# Altium PCB PCB2.PcbDoc (part 1 of 2)
Units mm, origin at the board's own origin, x right, y up, seen from the top; angles counter-clockwise.
Board outline 99.9 x 100 mm, 2 copper layers (Top Layer, Bottom Layer); 96 components, 76 nets, 354 pads, 43 vias.
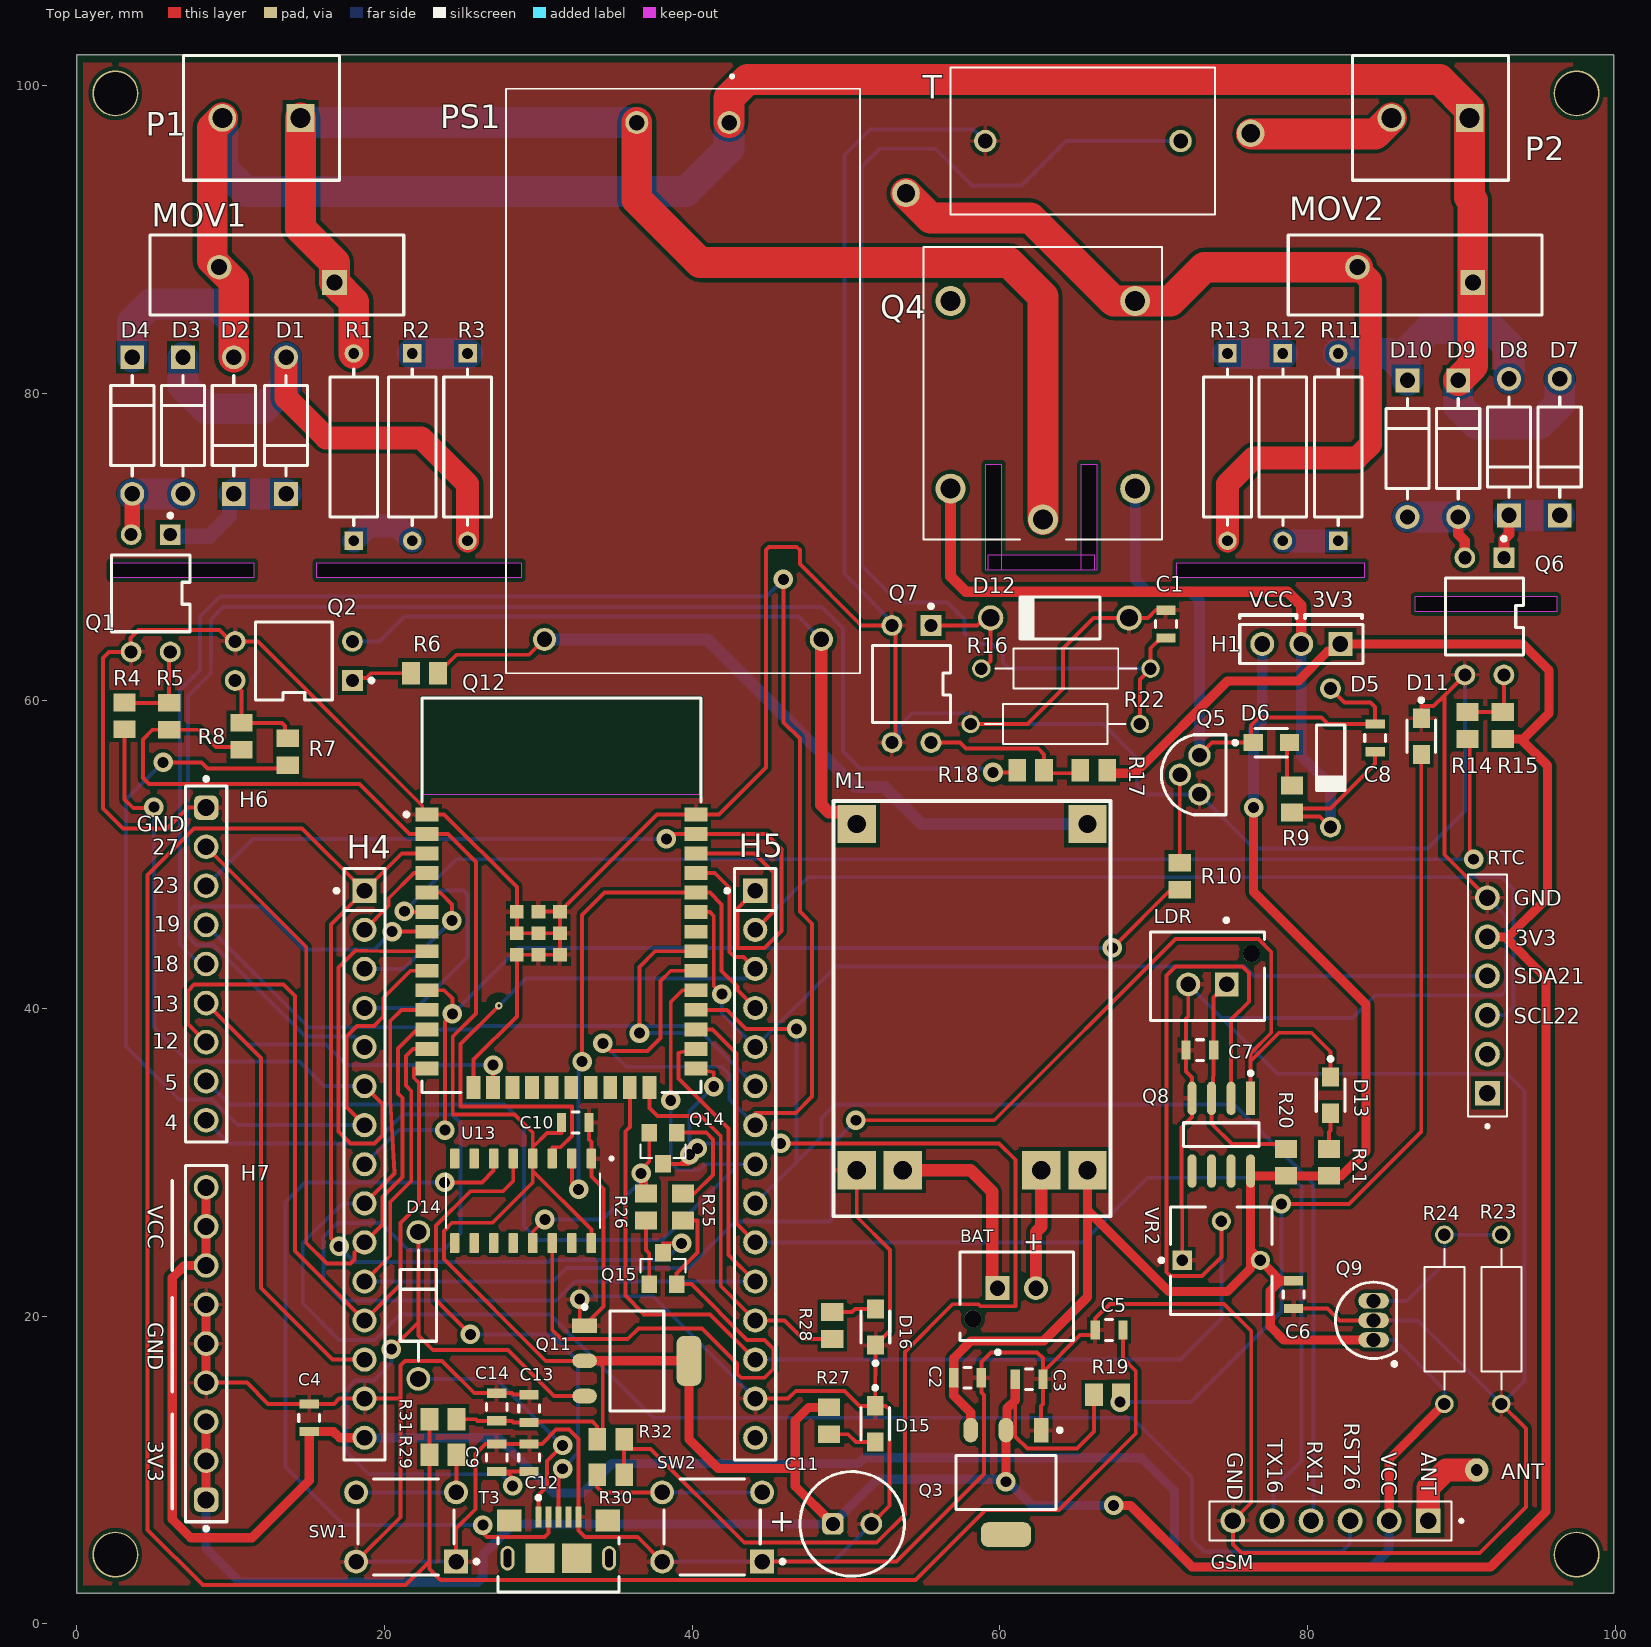
[diagram p0: Top Layer view]
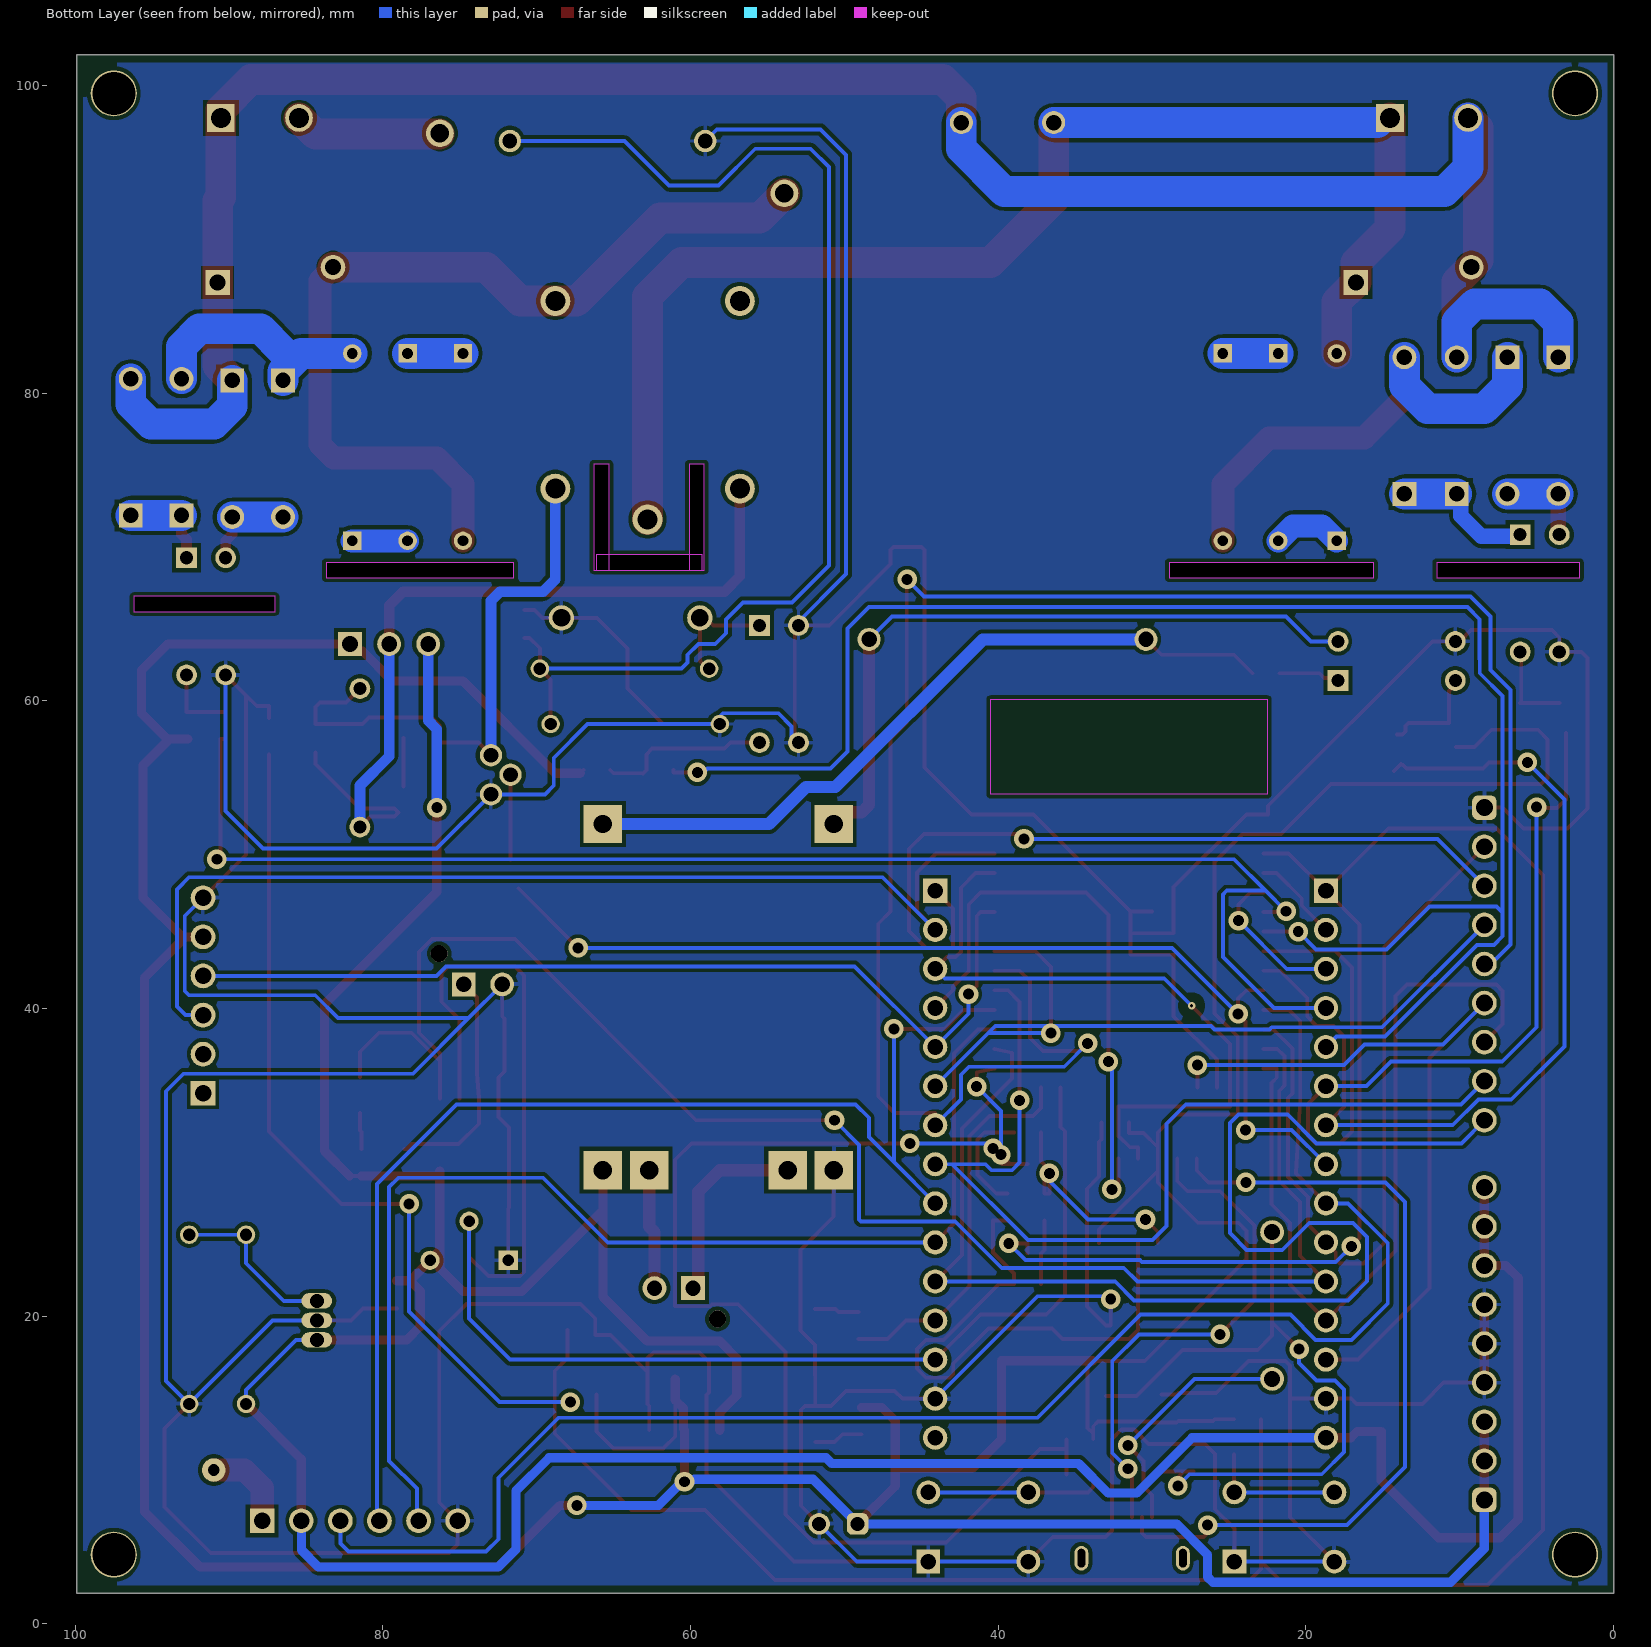
[diagram p1: Bottom Layer view, seen from below]
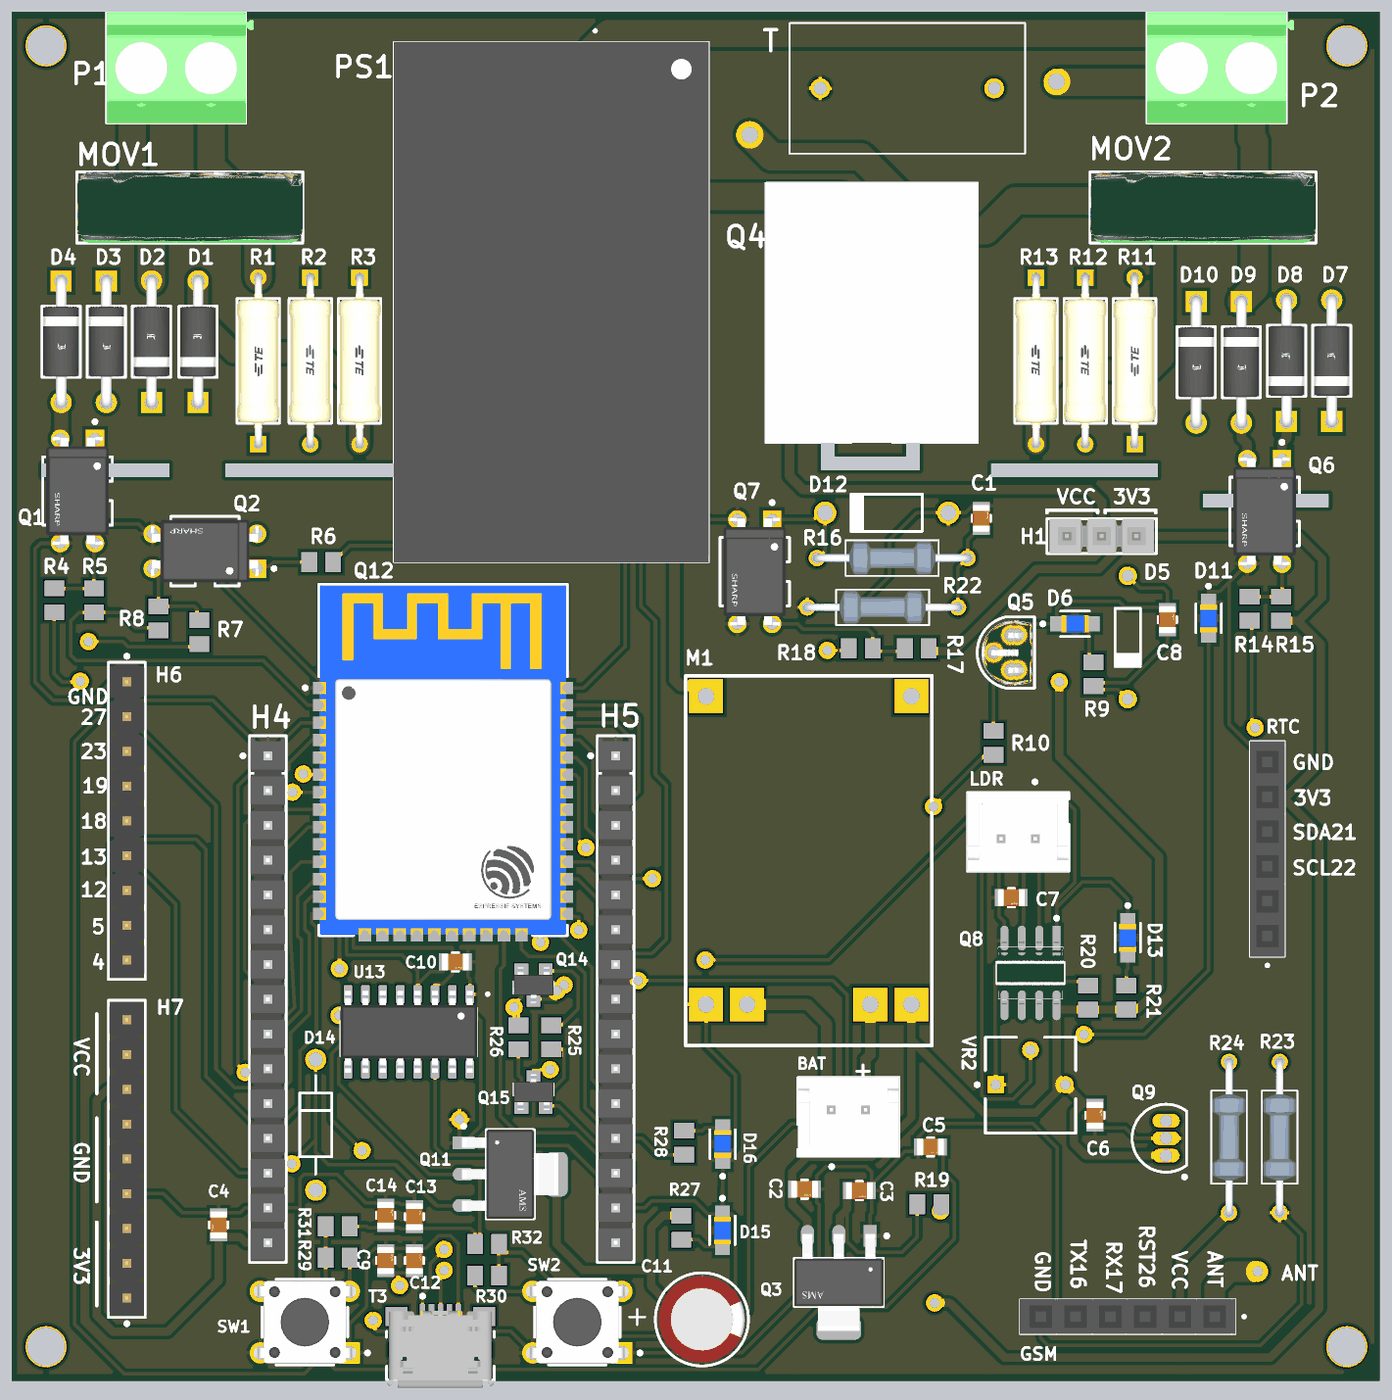
[diagram p2: 3D render of the assembled board from above, using the file's embedded part models]

## Layer stack, top to bottom
Top Solder: solder mask 0.0102, Solder Resist, Dk 3.5
Top Layer: signal copper 0.0356
Dielectric 1: dielectric 0.32, FR-4, Dk 4.8
Bottom Layer: signal copper 0.0356
Bottom Solder: solder mask 0.0102, Solder Resist, Dk 3.5

## Board outline
0,2 99.9,2 99.9,102 0,102
cut-out: 66.3,68.5 65.3,68.5 65.3,75.4 66.3,75.4
cut-out: 60.1,68.5 59.1,68.5 59.1,75.4 60.1,75.4
cut-out: 59.25,68.5 59.25,69.5 66.15,69.5 66.15,68.5
cut-out: 71.5,68 71.5,69 83.7,69 83.7,68
cut-out: 87,65.8 87,66.8 96.2,66.8 96.2,65.8
cut-out: 15.6,68 15.6,69 28.9,69 28.9,68
cut-out: 2.2,68 2.2,69 11.5,69 11.5,68

## Design rules (kind name [scope] priority, off if disabled: settings)
Clearance [All] p1: gap=0.254 ignorepadtopadclearanceinfootprint=FALSE
PolygonConnect [All] p1: connectstyle=Relief reliefconductorwidth=0.254 reliefentries=4 polygonreliefangle="90 Angle" airgapwidth=0.254
RoutingVias [All] p1: holewidth=0.711 width=1.27 viastyle="Through Hole" minholewidth=0.711 minwidth=1.27 maxholewidth=0.711 maxwidth=1.27
SolderMaskExpansion [All] p1: expansion=0.102 istentingtop=FALSE
SupplyNets "Schematic Supply Nets_3" [InNet('VCC')] p1: voltage=0.000
SupplyNets "Schematic Supply Nets_2" [InNet('+3.3')] p2: voltage=0.000
SupplyNets "Schematic Supply Nets" [InNet('GND')] p3: voltage=0.000
Width [All] p1: maxlimit=2 minlimit=0.254 preferedwidth=0.254 minimp=50.000000 maximp=50.000000 favimp=50.000000
30 further rules are at their usual default settings.

## Classes and differential pairs
component class Sheet2: C9 C10 C11 C12 C13 C14 D14 D15 D16 H4 H6 H7 Q11 Q12 Q14 Q15 R25 R26 R27 R28 R29 R30 R31 R32 SW1 SW2 T3 U13
component class Sheet1: BAT C1 C2 C3 C4 C5 C6 C7 C8 D1 D2 D3 D4 D5 D6 D7 D8 D9 D10 D11 D12 D13 GSM H1 H5 LDR M1 MOV1 MOV2 P1 P2 PS1 Q1 Q2 Q3 Q4 Q5 Q6 Q7 Q8 Q9 R1 R2 R3 R4 R5 R6 R7 R8 R9 R10 R11 R12 R13 R14 R15 R16 R17 R18 R19 R20 R21 R22 R23 R24 RTC T VR2

## Components (designator, comment, footprint, x,y, rotation, side; value= is the part's Value field where it differs from the comment)
BAT "Battary" FP-B2B-XH-AM_LF_SN-MFG 61.1,21.3 r180 top
C1 "104" FP-GRM21B-0_1-MFG 70.8,65 r90 top
C2 "10uf" FP-GRM21B-0_1-MFG 57.9,16 r0 top
C3 "10uf" FP-GRM21B-0_1-MFG 61.9,15.9 r0 top
C4 "10uf" FP-GRM21B-0_1-MFG 15.1,13.4 r270 top
C5 "10uf" FP-GRM21B-0_1-MFG 67.1,19.1 r0 top
C6 "104" FP-GRM21B-0_1-MFG 79.1,21.4 r90 top
C7 "104" FP-GRM21B-0_1-MFG 73,37.3 r0 top
C8 "10uf" FP-GRM21B-0_1-MFG 84.4,57.6 r90 top
C9 "10uf" FP-GRM21B-0_1-MFG 27.3,10.8 r90 top
C10 "10uf" FP-GRM21B-0_1-MFG 32.4,32.6 r0 top
C11 "100uf" WCAP-PT5H_D6.3H11 50.4,6.5 r180 top
C12 "104" FP-GRM21B-0_1-MFG 29.4,10.8 r90 top
C13 "104" FP-GRM21B-0_1-MFG 29.4,14 r90 top
C14 "10uf" FP-GRM21B-0_1-MFG 27.3,14.1 r90 top
D1 "1N4007" FP-1N4007-MFG 13.6,77.9 r90 top value=15pF
D2 "1N4007" FP-1N4007-MFG 10.2,77.9 r90 top value=15pF
D3 "1N4007" FP-1N4007-MFG 6.9,77.9 r270 top value=15pF
D4 "1N4007" FP-1N4007-MFG 3.6,77.9 r270 top value=15pF
D5 "1N4148" NXP-SOD27-2_V 81.5,56.3 r270 top
D6 "RLY" FP-KP-2012QBC-D-MFG 77.649,57.291 r0 top
D7 "1N4007" FP-1N4007-MFG 96.4,76.5 r90 top value=15pF
D8 "1N4007" FP-1N4007-MFG 93.1,76.5 r90 top value=15pF
D9 "1N4007" FP-1N4007-MFG 89.8,76.4 r270 top value=15pF
D10 "1N4007" FP-1N4007-MFG 86.5,76.4 r270 top value=15pF
D11 "PWR" FP-KP-2012QBC-D-MFG 87.4,57.7 r270 top
D12 "1N4728A" FAIR-DO-41-2_V 63.9,65.4 r180 top
D13 "LED" FP-KP-2012QBC-D-MFG 81.5,34.375 r270 top
D14 "1N5817G" ONSC-AXIAL_LEAD-2-59-10_P 22.196,20.7 r270 top
D15 "PWR" FP-KP-2012QBC-D-MFG 51.9,13 r270 top
D16 "PWR" FP-KP-2012QBC-D-MFG 51.916,19.3 r90 top
GSM "PPTC061LFBN-RC" SULLINS_PPTC061LFBN-RC 81.5,6.7 r180 top
H1 "TSW-103-07-F-S" SMTC-TSW-103-07-X-S 82.14,63.7 r180 top
H4 "TSW-115-23-T-S" FP-TSW-115-23-T-S-MFG 18.7,29.88 r270 top
H5 "TSW-115-23-T-S" FP-TSW-115-23-T-S-MFG 44.1,29.88 r270 top
H6 "PWR" 61300911121 8.4,42.9 r270 top
H7 "PWR" 61300911121 8.4,18.22 r90 top
LDR "LDR" FP-B2B-XH-AM_LF_SN-MFG 73.5,42.1 r0 top
M1 "TP4057" TP4056 67.2,26.5 r90 top
MOV1 "MOV275VAC" FP-MOV-14D431K-MFG 13,87.7 r180 top value=552pF
MOV2 "MOV275VAC" FP-MOV-14D431K-MFG 87,87.7 r180 top value=552pF
P1 "AC230V IN" PHOE-1729128-2_V 12,97.9 r180 top
P2 "1729128" PHOE-1729128-2_V 88,97.9 r180 top
PS1 "HLK-5M05" CONV_HLK-5M05 39.4,80.8 r270 top
Q1 "PC817" FP-PC817X1J000F-MFG 4.8,67 r270 top
Q2 "PC817" FP-PC817X1J000F-MFG 14.1,62.6 r180 top
Q3 "AMS1117 3.3" FP-AMS1117-IPC_A 60.4,9.2 r270 top
Q4 "3VDC Relay" RELAY_PR13-5V-450-1C 62.8,80 r90 top
Q5 "S8050" FP-135AN-MFG 72.6,55.2 r0 top
Q6 "PC817" FP-PC817X1J000F-MFG 91.5,65.5 r270 top
Q7 "PC817" FP-PC817X1J000F-MFG 54.256,61.1 r270 top
Q8 "LM358" FP-D0008A-IPC_B 74.4,31.8 r270 top
Q9 "TL431CZ" TO-92 84.3,19.73 r0 top
Q11 "AMS1117 3.3" FP-AMS1117-IPC_A 36.4,17.1 r0 top
Q12 "ESP32-WROOM-32E (16MB)" FP-ESP32-WROOM-32E_16MB-MFG 31.5,47.36 r0 top
Q14 "S8050" SOT-23 38.1,30.916 r180 top
Q15 "S8050" SOT-23 38.1,23.1 r0 top
R1 "75K" FP-CFR50J2K2-MFG 18,76.5 r90 top
R2 "75K" FP-CFR50J2K2-MFG 21.8,76.5 r270 top
R3 "75K" FP-CFR50J2K2-MFG 25.4,76.5 r270 top
R4 "1K" RESC2013X70X40NL20T20 3.1,59.025 r90 top
R5 "10K" RESC2013X70X40NL20T20 6,59 r90 top
R6 "330R" RESC2013X70X40NL20T20 22.6,61.8 r0 top
R7 "1K" RESC2013X70X40NL20T20 13.7,56.7 r90 top
R8 "10K" RESC2013X70X40NL20T20 10.7,57.7 r90 top
R9 "1K" RESC2013X70X40NL20T20 79,53.625 r270 top
R10 "1K" RESC2013X70X40NL20T20 71.7,48.6 r270 top
R11 "75K" FP-CFR50J2K2-MFG 82,76.5 r90 top
R12 "75K" FP-CFR50J2K2-MFG 78.4,76.5 r270 top
R13 "75K" FP-CFR50J2K2-MFG 74.8,76.5 r270 top
R14 "1K" RESC2013X70X40NL20T20 90.4,58.4 r270 top
R15 "10K" RESC2013X70X40NL20T20 92.7,58.4 r90 top
R16 "330R" RESAD1100W55L680D260 64.3,62.1 r0 top
R17 "10K" RESC2013X70X40NL20T20 66.1,55.5 r180 top
R18 "1K" RESC2013X70X40NL20T20 62,55.5 r0 top
R19 "1K" RESC2013X70X40NL20T20 67,14.9 r180 top
R20 "10K" RESC2013X70X40NL20T20 78.6,30 r90 top
R21 "1K" RESC2013X70X40NL20T20 81.4,30 r90 top
R22 "10K" RESAD1100W55L680D260 63.601,58.5 r180 top
R23 "4K7" RESAD1100W55L680D260 92.6,19.8 r270 top
R24 "2K8" RESAD1100W55L680D260 88.9,19.8 r90 top
R25 "10K" RESC2013X70X40NL20T20 39.4,27.1 r270 top
R26 "10K" RESC2013X70X40NL20T20 37,27.1 r270 top
R27 "1K" RESC2013X70X40NL20T20 48.9,13.2 r90 top
R28 "1K" RESC2013X70X40NL20T20 49.1,19.4 r270 top
R29 "470R" RESC2013X70X40NL20T20 23.8,11 r0 top
R30 "470R" RESC2013X70X40NL20T20 34.7,9.7 r180 top
R31 "10K" RESC2013X70X40NL20T20 23.8,13.3 r180 top
R32 "10K" RESC2013X70X40NL20T20 34.7,12 r0 top
RTC "PPTC061LFBN-RC" SULLINS_PPTC061LFBN-RC 91.7,40.85 r90 top
SW1 "RST" FP-TL1105AF160Q-MFG 21.4,6.3 r180 top
SW2 "BOOT" FP-TL1105AF160Q-MFG 41.3,6.3 r180 top
T "AX-0500" INDRR1270W55L1720T953H2040_AX-0500 65.4,96.4 r180 top
T3 "Micro USB" FCI-10118193-0001LF-5_V 31.3,5.621 r0 top
U13 "CH340G" SOIC127P600X180-16N 29,27.5 r270 top
VR2 "10K" BOUR-3362P 74.4,23.6 r0 top

## Footprints (in the part's own frame and the unit in brackets; to place one, negate y for a bottom-side part, rotate by r counter-clockwise, add the part's x,y. Pads: shape width x height; smd on the part's side, far side on the other; paste and mask are expansions set on the pad)
61300911121 [mm] "Pin Header, pitch 2.54 mm, THT, Vertical, single row, 9p"
  rrect50% 1.6x1.6 hole 1.1: 1(-10.16,0)
  round 1.6 hole 1.1: 2(-7.62,0) 3(-5.08,0) 4(-2.54,0) 5(0,0) 6(2.54,0) 7(5.08,0) 8(7.62,0) 9(10.16,0)
  silkscreen extent -12.15,-1.34 11.58,1.35, body extent -11.43,-1.27 11.43,1.27, height 8.57
BOUR-3362P [mm] "THD, 3-Leads, Body 6.6x6.99mm, Pitch 2.54mm"
  rect 1.25x1.25 hole 0.75: 1(-2.54,0.035)
  round 1.25 hole 0.75: 2(0,2.575) 3(2.54,0.035)
  silkscreen extent -4.02,-3.49 3.3,3.49, body extent -3.3,-3.49 3.3,3.49, height 4.95
CONV_HLK-5M05 [mm]
  round 1.5 hole 1: 1(-16.8,3) 2(-16.8,-3) 3(16.8,9) 4(16.8,-9)
  silkscreen extent -19.9,-11.5 19,11.5, body extent -19,-11.5 19,11.5, height 23
FAIR-DO-41-2_V [mm] "2-Leads, Axial leaded, Body 2.72x5.2mm, Pin Spacing 9mm"
  round 1.65 hole 1.15: 1(-4.5,0) 2(4.5,0)
  silkscreen extent -2.6,-1.36 2.6,1.36, body extent -4.93,-1.36 4.93,1.36, height 2.71
FCI-10118193-0001LF-5_V [mm] "Micro, USB-B, 5-Leads, Body 7.86x5.05mm, Pitch 0.65 mm"
  rect 0.4x1.35 smd: 1(-1.3,1.325) 2(-0.65,1.325) 3(0,1.325) 4(0.65,1.325) 5(1.3,1.325)
  rect 1.6x1.4 smd: 6(-3.2,1.1) 7(3.2,1.1)
  rect 1.9x1.9 smd: 8(-1.2,-1.35) 9(1.2,-1.35)
  oval 0.9x1.6 hole 0.5 slot 1.2 at 90 deg: 10(-3.3,-1.35) 11(3.3,-1.35)
  silkscreen extent -3.93,-3.55 3.93,2.7, body extent -3.93,-4.16 3.93,1.5, height 2.83
FP-1N4007-MFG [mm]
  rect 1.55x1.55 hole 1 paste-2539.97 mask+0: 1(-4.44,0)
  round 1.55 hole 1 paste-2539.97 mask+0: 2(4.44,0)
  silkscreen extent -3.26,-1.4 3.26,1.4, body extent -5.32,-1.5 5.32,1.5, height 0.25
FP-135AN-MFG [mm]
  round 1.45 hole 0.95 paste-2539.97 mask+0: 1(0.38,-1.27) 2(-0.89,0) 3(0.38,1.27)
  silkscreen extent -2.1,-2.6 2.1,2.6, body extent -2.19,-2.7 2.19,2.7, height 0.25
FP-AMS1117-IPC_A [mm]
  rect 1.604x0.952 smd paste+0 mask+0: 1(-3.395,2.29)
  rrect100% 1.604x0.952 smd paste+0 mask+0: 2(-3.395,0) 3(-3.395,-2.29)
  rrect59% 1.604x3.262 smd paste+0 mask+0: 4(3.395,0)
  silkscreen extent -3.52,-3.25 1.75,3.63, body extent -4.7,-3.75 4.7,3.75, height 0.25
FP-B2B-XH-AM_LF_SN-MFG [mm]
  rect 1.55x1.55 hole 1 paste-2539.97 mask+0: 1(1.25,-0.525)
  round 1.55 hole 1 paste-2539.97 mask+0: 2(-1.25,-0.525)
  round 1.1 hole 1.1 unplated paste-2539.97 mask+0: ""(2.85,1.475)
  silkscreen extent -3.7,-2.88 3.7,3.77, body extent -3.8,-2.98 3.8,2.98, height 0.25
FP-CFR50J2K2-MFG [mm]
  rect 1.2x1.2 hole 0.7 paste-2539.97 mask+0: 1(-6.09,0)
  round 1.2 hole 0.7 paste-2539.97 mask+0: 2(6.09,0)
  silkscreen extent -5.09,-1.55 5.09,1.55, body extent -6.79,-1.65 6.79,1.65, height 0.25
FP-D0008A-IPC_B [mm]
  rect 2.169x0.582 smd paste+0 mask+0: 1(-2.364,1.905)
  rrect100% 2.169x0.582 smd paste+0 mask+0: 2(-2.364,0.635) 3(-2.364,-0.635) 4(-2.364,-1.905) 5(2.364,-1.905) 6(2.364,-0.635) 7(2.364,0.635) 8(2.364,1.905)
  silkscreen extent -4.12,-2.45 0.78,2.45, body extent -3.7,-2.7 3.7,2.7, height 0.25
FP-ESP32-WROOM-32E_16MB-MFG [mm]
  rect 1.5x0.9 smd paste+0 mask+0: 1(-8.75,5.26) 2(-8.75,3.99) 3(-8.75,2.72) 4(-8.75,1.45) 5(-8.75,0.18) 6(-8.75,-1.09) 7(-8.75,-2.36) 8(-8.75,-3.63) 9(-8.75,-4.9) 10(-8.75,-6.17) 11(-8.75,-7.44) 12(-8.75,-8.71) 13(-8.75,-9.98) 14(-8.75,-11.25) 25(8.75,-11.25) 26(8.75,-9.98) 27(8.75,-8.71) 28(8.75,-7.44) 29(8.75,-6.17) 30(8.75,-4.9) 31(8.75,-3.63) 32(8.75,-2.36) 33(8.75,-1.09) 34(8.75,0.18) 35(8.75,1.45) 36(8.75,2.72) 37(8.75,3.99) 38(8.75,5.26)
  rect 0.9x1.5 smd paste+0 mask+0: 15(-5.715,-12.5) 16(-4.445,-12.5) 17(-3.175,-12.5) 18(-1.905,-12.5) 19(-0.635,-12.5) 20(0.635,-12.5) 21(1.905,-12.5) 22(3.175,-12.5) 23(4.445,-12.5) 24(5.715,-12.5)
  rect 0.9x0.9 smd paste+0 mask+0: 39(-2.9,-3.86) 39(-2.9,-2.46) 39(-2.9,-1.06) 39(-1.5,-3.86) 39(-1.5,-2.46) 39(-1.5,-1.06) 39(-0.1,-3.86) 39(-0.1,-2.46) 39(-0.1,-1.06)
  Keep-Out Layer region: -9,6.56 9,6.56 9,12.75 -9,12.75
  silkscreen extent -10.2,-12.82 9.08,12.82, body extent -9.6,-13.35 9.6,12.93, height 0.25
FP-GRM21B-0_1-MFG [mm]
  rect 0.6x1.25 smd paste+0 mask+0: 1(-0.9,0) 2(0.9,0)
  silkscreen extent -0.23,-0.68 0.23,0.67, body extent -1.3,-0.77 1.3,0.77, height 0.25
FP-KP-2012QBC-D-MFG [mm]
  rect 1.25x1.1 smd paste+0 mask+0: 1(-1.175,0) 2(1.175,0)
  silkscreen extent -2.47,-0.93 1.05,0.93, body extent -1.9,-0.77 1.9,0.77, height 0.25
FP-MOV-14D431K-MFG [mm]
  rect 1.6x1.6 hole 1.05 paste-2539.97 mask+0: 1(-3.75,0.5)
  round 1.6 hole 1.05 paste-2539.97 mask+0: 2(3.75,-0.5)
  silkscreen extent -8.25,-2.6 8.25,2.6, body extent -8.35,-2.7 8.35,2.7, height 0.25
FP-PC817X1J000F-MFG [mm]
  rect 1.35x1.35 hole 0.85 paste-2539.97 mask+0: 1(-3.81,1.27)
  round 1.35 hole 0.85 paste-2539.97 mask+0: 2(-3.81,-1.27) 3(3.81,-1.27) 4(3.81,1.27)
  silkscreen extent -5.17,-2.54 2.5,2.54, body extent -4.58,-2.64 4.58,2.64, height 0.25
FP-TL1105AF160Q-MFG [mm]
  rect 1.55x1.55 hole 1 paste-2539.97 mask+0: 1(-3.25,2.25)
  round 1.55 hole 1 paste-2539.97 mask+0: 2(3.25,2.25) 3(-3.25,-2.25) 4(3.25,-2.25)
  silkscreen extent -4.7,-3.13 3.13,3.13, body extent -4.13,-3.22 4.13,3.22, height 0.25
FP-TSW-115-23-T-S-MFG [mm]
  rect 1.57x1.57 hole 1.02 paste-2539.97 mask+0: 1(-17.78,0)
  round 1.57 hole 1.02 paste-2539.97 mask+0: 2(-15.24,0) 3(-12.7,0) 4(-10.16,0) 5(-7.62,0) 6(-5.08,0) 7(-2.54,0) 8(0,0) 9(2.54,0) 10(5.08,0) 11(7.62,0) 12(10.16,0) 13(12.7,0) 14(15.24,0) 15(17.78,0)
  silkscreen extent -19.24,-1.95 19.24,1.34, body extent -19.34,-1.44 19.34,1.44, height 0.25
INDRR1270W55L1720T953H2040_AX-0500 [mm]
  round 1.458 hole 0.95: 1(-6.35,0) 3(6.35,0)
  silkscreen extent -8.6,-4.77 8.6,4.77
NXP-SOD27-2_V [mm] "SOD27, 2-Leads, Dia 1.85mm, Body Length 4.25mm, Pin Spacing 9mm"
  round 1.35 hole 0.85: 1(-4.5,0) 2(4.5,0)
  silkscreen extent -2.12,-0.93 2.13,0.92, body extent -4.78,-0.92 4.78,0.92, height 1.84
ONSC-AXIAL_LEAD-2-59-10_P [mm] "AXIAL, 2-Leads, Diameter 2.35mm"
  round 1.55 hole 1.05: 1(-4.77,0) 2(4.77,0)
  silkscreen extent -3.59,-1.18 3.59,1.17
PHOE-1729128-2_V [mm] "Receptacle, 2-Leads, Body 8.1x10.16mm, Pitch 5.08mm"
  rect 1.8x1.8 hole 1.3: 1(-2.54,0)
  round 1.8 hole 1.3: 2(2.54,0)
  silkscreen extent -5.08,-4.05 5.08,4.05, body extent -5.65,-4.05 5.08,4.05, height 10.01
RELAY_PR13-5V-450-1C [mm]
  round 1.95 hole 1.3: A1(-6.2,6) A2(-6.2,-6) COM(-8.2,0) NC(6,6) NO(6,-6)
  silkscreen extent -9.5,-7.75 9.5,7.75, body extent -9.5,-7.75 9.5,7.75, height 15.5
RESAD1100W55L680D260 [mm]
  round 1.2 hole 0.8: 1(-5.5,0) 2(5.5,0)
  silkscreen extent -4.58,-1.3 4.58,1.3, body extent -5.77,-1.2 5.77,1.2, height 2.4
RESC2013X70X40NL20T20 [mm] "Chip Resistor, 2-Leads, Body 2.00x1.25mm, IPC Medium Density"
  rect 1.15x1.45 smd: 1(-0.875,0) 2(0.875,0)
  body extent -1.1,-0.72 1.1,0.72, height 0.7
SMTC-TSW-103-07-X-S [mm] ".025 SQ Post Terminal Strip Assembly, 1x3 Pins, Vertical, 2.54mm Pitch, Male"
  rect 1.55x1.55 hole 1.02: 1(0,0)
  round 1.55 hole 1.02: 2(2.54,0) 3(5.08,0)
  silkscreen extent -1.46,-1.27 6.54,1.27, body extent -1.27,-1.27 6.35,1.27, height 8.38
SOIC127P600X180-16N [mm]
  rrect25% 1.31x0.62 smd: 1(-2.75,4.445) 2(-2.75,3.175) 3(-2.75,1.905) 4(-2.75,0.635) 5(-2.75,-0.635) 6(-2.75,-1.905) 7(-2.75,-3.175) 8(-2.75,-4.445) 9(2.75,-4.445) 10(2.75,-3.175) 11(2.75,-1.905) 12(2.75,-0.635) 13(2.75,0.635) 14(2.75,1.905) 15(2.75,3.175) 16(2.75,4.445)
  silkscreen extent -2.85,-5 1.77,5.85, body extent -3,-5 3,5, height 1.8
SOT-23 [mil]
  rect 40x45 smd: 1(-35,-40) 2(35,-40) 3(0,40)
  silkscreen extent -57,-10 58,25, body extent -57,-51 57,51, height 55
SULLINS_PPTC061LFBN-RC [mm]
  rect 1.605x1.605 / inner round 1.605 / far side rect 1.605x1.605 hole 1.07: 1(-6.35,0)
  round 1.605 hole 1.07: 2(-3.81,0) 3(-1.27,0) 4(1.27,0) 5(3.81,0) 6(6.35,0)
  silkscreen extent -8.6,-1.27 7.87,1.27, body extent -7.87,-1.27 7.87,1.27, height 8.51
TO-92 [mm] "TO, Flat Index; 3 In-Line, Axial Leads; Body Dia. 4.7mm; Lead Dia. 0.56 mm (max)"
  oval 2x1 hole 0.9: 1(0,-1.27) 2(0,0) 3(0,1.27)
  silkscreen extent -2.48,-2.95 1.5,2.48, body extent -2.48,-2.5 1.5,2.5, height 4.95
TP4056 [mm]
  rect 2.5x2.5 hole 1.2: 1(25.5,1.5) 2(25.5,16.5) 3(3,1.5) 4(3,4.5) 5(3,13.5) 6(3,16.5)
  silkscreen extent 0,0 27,18
WCAP-PT5H_D6.3H11 [mm] "Aluminum Polymer Capacitors, body Diameter 6.3mm"
  rrect50% 1.4x1.4 hole 0.9: 1(1.25,0)
  round 1.4 hole 0.9: 2(-1.25,0)
  silkscreen extent -3.4,-3.4 3.4,3.4, body extent -3.14,-3.15 3.12,3.13, height 11.31

## Part data
BAT LDR: library part CMP-17439-000037-1, "CONN HEADER VERT 2POS 2.5MM", Color=Green, Contact Resistance=20mR, Housing Color=White, Max Current Rating=3A, Max Operating Temperature=85°C, Max Voltage Rating (AC)=250V, Min Operating Temperature=-25°C, Connector Type="Male Pin", Contact Material=Brass, Contact Plating=Tin, Contact Type="Male Pin", Depth=5.75mm, Fastening Type=Detent, Housing Material=Polyamide, Lead Free="Lead Free", Length=7.4mm, Mount="Through Hole", Number of Positions=2, Number of Rows=1, Orientation=Straight, Packaging=Bulk, Pitch=2.5mm, Series=XH, Termination=Solder
C1 C2 C3 C4 C5 C6 C7 C8 C9 C10 C12 C13 C14: library part CMP-2007-03453-2, "Chip Multilayer Ceramic Capacitors for General Purpose, 0805, 10uF, X5R, 15%, 10%, 16V", Capacitance=10uF, Case Code (Imperial)=0805, Case Code (Metric)=2012, Dielectric=X5R, Max Operating Temperature=85°C, Min Operating Temperature=-55°C, Package Quantity=1, Tolerance=10%, Voltage=16V, Case/Package=0805, Depth=1.25mm, Height=1.25mm, Lead Free="Lead Free", Length=2mm, Material=Ceramic, Mount="Surface Mount", Packaging="Tape and Reel", Radiation Hardening=No, REACH SVHC="No SVHC", Termination=SMD/SMT, Thickness=0.053inch, Voltage Rating=16V, Voltage Rating (DC)=16V, Width=1.25mm
C11: library part CMP-03913-54202640-1, "870235373001 WCAP-PT5H Aluminum Polymer Capacitors", Capacitance=100µF, Case/Package=Radial, ESR (Equivalent Series Resistance)=12mΩ, Leakage Current=160µA, Max Operating Temperature=105°C, Min Operating Temperature=-55°C, Ripple Current=4.8A, Voltage Rating=16V, Diameter=6.3mm, Length=11mm, Life (Hours)=5000hours, NexarPartId=54202640, Pitch=2.5mm, REACH SVHC=Unknown, RoHS=Compliant, Voltage Rating (DC)=16V
D1 D2 D3 D4 D7 D8 D9 D10: library part CMP-123542-000001-1, "Rectifier diode 1000 V 1 A DO-41, ,", Capacitance=15pF, Forward Current=1A, Manufacturer=Diotec, Max Junction Temp=+175°C, Max Repetitive Reverse Voltage=1000V, Max Surge Forward Current=27A, Peak Reverse Current=5uA, Temperature="-50°C to +175°C", Temperature Range Low=-50°C, Automotive=No, Category=Diode, ComponentLink2Description=Datasheet, ComponentLink2URL=https://datasheet.octopart.com/1N4007-Diotec-datasheet-62346875.pdf, Device Class L1="Discrete Semiconductors", Device Class L2=Diodes, Device Class L3="Rectifier Diodes", Height=2.8mm, Ipc Land Pattern Name=DIOAD888W100L520D280, Lead Free=Yes, Manufacturer Part Number=1N4007, Octopart=https://octopart.com/1n4007-diotec-4040411, Package=1N4007, Reverse Voltage=1000V, RoHS=TRUE, Temperature Range High=+175°C
D5: library part CMP-0648-00002-1, "High-speed Diode, 100 V, 450 mA, 2-Pin SOD27, RoHS", Manufacturer="NXP Semiconductors", Cd="4 pF Max.", ComponentLink1Description="Manufacturer URL", ComponentLink1URL=http://www.nxp.com/, ComponentLink2Description=Datasheet, ComponentLink2URL=http://www.nxp.com/documents/data_sheet/1N4148_1N4448.pdf, ComponentLink3Description="Package Specification", ComponentLink3URL=http://www.nxp.com/documents/data_sheet/1N4148_1N4448.pdf, Configuration=Single, DatasheetVersion=Aug-04, IF="200 mA Max.", IFRM="450 mA", IFSM="4 A Max.", IR (VR="20 V)=25 nA", Mounting Technology="Through Hole", PackageDescription="2-Pin Hermetically Sealed Glass Package, Axial Leaded, Dia 1.85 mm, Body Length 4.25 mm, Lead Spread 25.4 mm", PackageReference=SOD27, PackageVersion=Aug-04, PartNumber=1N4148, RoHS=TRUE, Trr="4 ns Max.", VF (IF="10 mA)=1 V", VR="100 V Max."
D6 D11 D13 D15 D16: library part CMP-44529-000058-1, "LED, Low Power, Blue, SMD, 0805 [2012 Metric], 20 mA, 3.3 V, 465 nm", Case/Package=2012, Color=Blue, Forward Current=20mA, Forward Voltage=3.3V, Lens Color=Clear, Dominant Wavelength=470nm, Height=1.1mm, Length=1.25mm, Lens Style=Diffused, Luminous Intensity=100mcd, Mount="Surface Mount", Number of LEDs=1, Number of Pins=2, Packaging="Tape and Reel", Radiation Hardening=No, REACH SVHC="No SVHC", RoHS Compliant=Yes, Series=KP, Viewing Angle=120°, Wavelength=465nm, Width=2mm
D12: library part CMP-0892-00028-1, "Zener Diode, 3.3V, 1W, 5%, -65 to 200 degC, 2-Pin DO-41, Body 2.72 x 5.2 mm, RoHS", Manufacturer="Fairchild Semiconductor", Operating and Storage Temperature Range="-65 to 200 degC", Test Current IZ (mA)=76, Tolerance=5%, ComponentLink1Description="Manufacturer URL", ComponentLink1URL=http://www.fairchildsemi.com/, ComponentLink2Description=Datasheet, ComponentLink2URL=http://www.fairchildsemi.com/ds/1N/1N4744A.pdf, ComponentLink3Description="Package Specification", ComponentLink3URL=http://www.fairchildsemi.com/dwg/DO/DO41A.pdf, DatasheetVersion="Rev. H3", IR (uA)=100, Mounting Technology="Through Hole", PackageDescription="2-Pin Axial leaded, Body 2.72 x 5.2 mm, Lead Spread 25.4 mm", PackageReference=DO-41-2, PackageVersion="Rev. 2", PartNumber=1N4728A, PD (W)=1, RoHS=TRUE, VZ (Max.) (V)=3.465, VZ (Min.) (V)=3.135, ZZ (Max) (ohm)=10
D14: library part CMP-1055-00035-1, "Rectifier, 2-Pin Axial_Lead, Pb-Free, Bulk Bag", Manufacturer="On Semiconductor", ComponentLink1Description="Manufacturer URL", ComponentLink1URL=http://www.onsemi.com/, ComponentLink2Description=Datasheet, ComponentLink2URL=http://www.onsemi.cn/pub_link/Collateral/1N5817-D.PDF, ComponentLink3Description="Package Specification", ComponentLink3URL=http://www.onsemi.cn/pub_link/Collateral/59-10.PDF, Configuration=Single, DatasheetVersion="Rev. 10", IFSM Max (A)=25, Mounting Technology="Through Hole", PackageDescription="2-Pin, Axial Lead, Diameter 2.35 mm", PackageReference=AXIAL_LEAD-2-59-10, PackageVersion="Rev. U, 02/2005", Packing="Bulk Bag", PartNumber=1N5817G, RoHS=TRUE
GSM RTC: "6 Position Total Single Row 2.54 mm Pitch Straight Female Header", Package=None, Check_prices=https://www.snapeda.com/parts/PPTC061LFBNRC/Sullins/view-part/?ref=eda, MF="Sullins Connector Solutions", MP=PPTC061LFBNRC, SnapEDA_Link=https://www.snapeda.com/parts/PPTC061LFBNRC/Sullins/view-part/?ref=snap
H1: library part CMP-1024-00331-1, "0.025\" SQ Post Header, Through-hole, Vertical, -55 to 125 degC, 2.54 mm Pitch, 3-Pin, Male, RoHS", Manufacturer=Samtec, Temperature Range="-55 to 125 degC", ComponentLink1Description="Manufacturer URL", ComponentLink1URL=http://www.samtec.com, ComponentLink2Description=Datasheet, ComponentLink2URL=http://www.samtec.com/documents/webfiles/pdf/TSW_TH.PDF, ComponentLink3Description="Package Specification", ComponentLink3URL=http://www.samtec.com/documents/webfiles/cpdf/TSW-XXX-XX-XXX-X-XX-XXX-MKT.pdf, DatasheetVersion=F-214, Mounting Technology=Through-hole, Orientation=Vertical, PackageDescription=".025[0.64] SQ. Post Terminal Strip Assembly", PackageReference=TSW-103-07-X-S, PackageVersion="DM, 8/1988", PartNumber=TSW-103-07-F-S, Pitch="2.54 mm", RoHS=True
H4 H5: library part CMP-02766-001466-1, "CONN HEADER VERT 15POS 2.54MM", Color=Black, Connector Type="Male Pin", Contact Material=Bronze, Contact Mating Length=0.23inch, Contact Plating=Tin, Contact Type="Male Pin", Gender=Male, Height=2.54mm, Housing Color=Black, Housing Material=Plastic, Lead Free="Lead Free", Length=38.1mm, Mount="Through Hole", Number of Contacts=15, Number of Positions=15, Number of Rows=1, Packaging=Bulk, Pitch=0.1inch, Radiation Hardening=No, REACH SVHC="No SVHC", RoHS Compliant=Yes, Series=TSW, Termination=Solder, Width=2.54mm
H6 H7: library part CMP-1502-01080-3, Color=Black, Contact Resistance=20mΩ, Current Rating=3A, Operating Supply Voltage=250V, Connector Type="Male Pin", Contact Material=Copper, Contact Mating Length=5.9944mm, Contact Plating=Gold, Gender=Male, Lead Pitch=2.54mm, Mount="Through Hole", NexarPartId=32855536, Number of Contacts=9, Number of Pins=9, Number of Positions=9, Number of Rows=1, Orientation=Vertical, Packaging=Bulk, Pitch=2.54mm, REACH SVHC=Unknown, RoHS=Compliant, Termination=Solder
MOV1 MOV2: library part CMP-07402-000008-1, "VARISTOR 430V 4.5KA DISC 14MM", Capacitance=552pF, Clamping Current=50A, Clamping Voltage=710V, Manufacturer="Bourns Inc.", Manufacturer Part Number=MOV-14D431K, Package=0, Temperature="-40°C to +105°C", Temperature Range High=+105°C, Temperature Range Low=-40°C, Varistor Voltage=387V, Voltage Rating Ac=275V, Voltage Rating Dc=350V, Voltage Tolerance=10%, Automotive=No, Category=Res, ComponentLink2Description=Datasheet, ComponentLink2URL=https://www.bourns.com/data/global/pdfs/MOV14D.pdf, Device Class L1="Circuit Protection", Device Class L2=Varistors, Device Class L3=unset, Digikey Description="VARISTOR 430V 4.5KA DISC 14MM", Height=20mm, Lead Free=Yes, Mouser Description="Varistors 430volts 14mm", Octopart=https://octopart.com/mov-14d431k-bourns-21388914, RoHS=TRUE
P1: library part CMP-2000-05815-1, "PCB Terminal Block, 13.5 A, 400 V, 2-Pin THD, RoHS, Bulk", Current Rating=13500mA, Manufacturer="Phoenix Contact", Package Description="2-Pin Through Hole Device, Body 8.1 x 10.16 mm, Pitch 5.08 mm", Package Reference=1729128-2, Package Version=03/2015, PartNumber=1729128, Voltage Rating=400V, Datasheet URL=https://datasheet.ciiva.com/16046/1729128-16046181.pdf, Datasheet Version=12/2013, Manufacturer URL=http://www.phoenixcontact.com/, Mounting Technology=ThroughHole, No. of Positions=2, No. of Rows=1, Orientation=Horizontal, Package URL=https://www.phoenixcontact.com/online/portal/pi/pxc/product_detail_page/!ut/p/b1/3VdJjqNKFDxLH8AFycySyWY2ozFsEPOMMQaDOX1XedGL_1Vdm5YXJleknhSKeBkvI6EA8ncAo3AYoDhBQGco6KN7VURTdemj9us_IEKEZo_YHiPAEWEFmDGOHMORkqKYCORBZxgL7ZoaZYcbFFUZ3fqxSY6GOuxydWUuHqz1ynmMFygu583Bob0Ewr6Sd_l-5m-kAueHiB0jpRwZwe58wwtkpxtMYd_LmGcDRU02dRNEyWt6Y2ti5pSyJ_reIkzIulrqApdnbT11V5jnCKbYNCvhEM1MCpPByat_X379-iThf08CI5GfOPqfBeS3BRoBOdD55AKVv0iLwCMq-2BrzXWSGRH7pUGD9uwXQjiph3xL0DKQwdGa0JImiIOmBNOestqgwTHSSs2oOep-78apyXQBvNi8ZLaFjvjWvcaUEBu0MC6Wbe-d6mB0FAebo2lUWinqYaZs5DAYzV0RP9yitUjnGJ0iI9xhZkT42OCQNUJJhkgWINNQLP2JFP6OpMg3JCVg70jqHT0lvKOnhHf0lPuOnnLf0VPuWx6_dxwUIvwk5WMkT0kLL1mh61l2yZVSzG3pYV_bqo-mj6uMKwKwdnnW8Jh5RTOJzMOA5c-eJDaZQw4mTMPH02PvS_ZAqNVjVTo2WyYLkwH_KU1mmmG5kjRhDqPXLwwVHvVOjCM60-fpXvTDfMGW1PVFVS1r4e4yVDk4ZdNbkUHvqPqQSeian4UD39fNKmachqdJ1NJbyk8rXT9mXTvPk3oE5meulKGgiruPJek-4I9hTT6G8ZLOyRSm2RRVbThERQad5OS28hdt4YW4vG0stgYYzsWsK4_7y6DZMjJSCqri1kyiZR5vD7pwIrNR7QwPHTcLTI5qT7eRlpHrdGiupYlqQDJ7zy_CND8fWWBoLRXxk1RVcXiBQwbTD4Xi7KL-FuO94t9xaqweXzH, Packing=Bulk, Pitch=5.08mm, RoHS=TRUE
P2: library part CMP-2000-05815-1, "PCB Terminal Block, 13.5 A, 400 V, 2-Pin THD, RoHS, Bulk", Current Rating=13500mA, Manufacturer="Phoenix Contact", Package Description="2-Pin Through Hole Device, Body 8.1 x 10.16 mm, Pitch 5.08 mm", Package Reference=1729128-2, Package Version=03/2015, Voltage Rating=400V, Datasheet URL=https://datasheet.ciiva.com/16046/1729128-16046181.pdf, Datasheet Version=12/2013, Manufacturer URL=http://www.phoenixcontact.com/, Mounting Technology=ThroughHole, No. of Positions=2, No. of Rows=1, Orientation=Horizontal, Package URL=https://www.phoenixcontact.com/online/portal/pi/pxc/product_detail_page/!ut/p/b1/3VdJjqNKFDxLH8AFycySyWY2ozFsEPOMMQaDOX1XedGL_1Vdm5YXJleknhSKeBkvI6EA8ncAo3AYoDhBQGco6KN7VURTdemj9us_IEKEZo_YHiPAEWEFmDGOHMORkqKYCORBZxgL7ZoaZYcbFFUZ3fqxSY6GOuxydWUuHqz1ynmMFygu583Bob0Ewr6Sd_l-5m-kAueHiB0jpRwZwe58wwtkpxtMYd_LmGcDRU02dRNEyWt6Y2ti5pSyJ_reIkzIulrqApdnbT11V5jnCKbYNCvhEM1MCpPByat_X379-iThf08CI5GfOPqfBeS3BRoBOdD55AKVv0iLwCMq-2BrzXWSGRH7pUGD9uwXQjiph3xL0DKQwdGa0JImiIOmBNOestqgwTHSSs2oOep-78apyXQBvNi8ZLaFjvjWvcaUEBu0MC6Wbe-d6mB0FAebo2lUWinqYaZs5DAYzV0RP9yitUjnGJ0iI9xhZkT42OCQNUJJhkgWINNQLP2JFP6OpMg3JCVg70jqHT0lvKOnhHf0lPuOnnLf0VPuWx6_dxwUIvwk5WMkT0kLL1mh61l2yZVSzG3pYV_bqo-mj6uMKwKwdnnW8Jh5RTOJzMOA5c-eJDaZQw4mTMPH02PvS_ZAqNVjVTo2WyYLkwH_KU1mmmG5kjRhDqPXLwwVHvVOjCM60-fpXvTDfMGW1PVFVS1r4e4yVDk4ZdNbkUHvqPqQSeian4UD39fNKmachqdJ1NJbyk8rXT9mXTvPk3oE5meulKGgiruPJek-4I9hTT6G8ZLOyRSm2RRVbThERQad5OS28hdt4YW4vG0stgYYzsWsK4_7y6DZMjJSCqri1kyiZR5vD7pwIrNR7QwPHTcLTI5qT7eRlpHrdGiupYlqQDJ7zy_CND8fWWBoLRXxk1RVcXiBQwbTD4Xi7KL-FuO94t9xaqweXzH, Packing=Bulk, PartNumber=1729128, Pitch=5.08mm, RoHS=TRUE
PS1: "AC DC 220V to 5V 5W 5Watt Isolated Switching Step-Down Power Supply Module Converter", Package=Package, Availability="Not in stock", Check_prices=https://www.snapeda.com/parts/HLK-5M05/Hi-link/view-part/?ref=eda, MF=Hi-link, MP=HLK-5M05, Price=None, SnapEDA_Link=https://www.snapeda.com/parts/HLK-5M05/Hi-link/view-part/?ref=snap
Q1 Q2 Q6 Q7: library part CMP-65434-000003-1, "OPTOISOLATOR 5KV TRANS 4DIP", Case/Package=DIP, Collector Emitter Breakdown Voltage=80V, Collector Emitter Saturation Voltage=200mV, Current Transfer Ratio=600%, Forward Current=50mA, Forward Voltage=1.4V, Input Current=20mA, Isolation Voltage=5kV, Max Operating Temperature=100°C, Max Power Dissipation=200mW, Min Operating Temperature=-30°C, Package Quantity=2000, Reverse Breakdown Voltage=6V, Collector Emitter Voltage (VCEO)=80V, Fall Time=18000ns, Max Collector Current=50mA, Max Input Current=50mA, Mount="Through Hole", Number of Channels=1, Number of Elements=1, Number of Pins=4, Output Current per Channel=50mA, Output Voltage=80V, Packaging=Sleeve, Power Dissipation=200mW, Radiation Hardening=No, Rise Time=18000ns
Q3 Q11: library part CMP-209535-000001-1, "LDO Voltage Regulators 1A, 3.3V", Dropout Voltage=1.1V, Manufacturer="Advanced Monolithic Systems", Manufacturer Part Number=AMS1117-3.3, Max Junction Temp=+125°C, Max Power Dissipation=1.2W, Max Supply Voltage=15V, Nominal Supply Current=5mA, Output Current=1A, Output Voltage=3.3V, Package=AMS1117, Temperature="-40°C to +125°C", Temperature Range Low=-40°C, Automotive=No, Category=IC, ComponentLink2Description=Datasheet, ComponentLink2URL=http://www.advanced-monolithic.com/pdf/ds1117.pdf, Device Class L1="Integrated Circuits (ICs)", Device Class L2="Power Management ICs", Device Class L3="Voltage Regulators - Linear", Height=1.8mm, Ipc Land Pattern Name=SOT229P700X180-4, Lead Free=Yes, Number Of Outputs=1, Octopart=https://octopart.com/ams1117-3.3-advanced+monolithic+systems-25899300, Output Type=Fixed, RoHS=TRUE, Standoff Height=0.64mm, Temperature Range High=+125°C
Q4: library part PR13-5V-450-1C, "19 x 15.5 x 15.8 mm, 5 V, 10 A, SPDT (1 Form C), Power Relay", Package=None, Check_prices=https://www.snapeda.com/parts/PR13-5V-450-1C/Same+Sky/view-part/?ref=eda, MF="Same Sky", MP=PR13-5V-450-1C, SnapEDA_Link=https://www.snapeda.com/parts/PR13-5V-450-1C/Same+Sky/view-part/?ref=snap
Q5: library part CMP-00278-84331634-1, "SS8050DBU Bipolar (BJT) Single Transistor, NPN, 25 V, 100 MHz, 1 W, 1.5 A, 160", Case/Package=TO-92, Collector Base Voltage (VCBO)=40V, Collector Emitter Breakdown Voltage=25V, Collector Emitter Saturation Voltage=500mV, Current Rating=1.5A, Emitter Base Voltage (VEBO)=6V, Frequency=100MHz, Manufacturer Lifecycle Status=ACTIVE, Max Junction Temperature (Tj)=150°C, Max Power Dissipation=1W, Min Operating Temperature=-65°C, Output Power=2W, Collector Emitter Voltage (VCEO)=25V, Element Configuration=Single, Gain Bandwidth Product=100MHz, Height=4.58mm, hFE Min=85, Lead Free="Lead Free", Length=4.58mm, Lifecycle Status=Production, Max Collector Current=1.5A, Max Frequency=100MHz, Max Operating Temperature=150°C, Mount="Through Hole", NexarPartId=84331634, Number of Elements=1, Number of Pins=3, Packaging=Bulk, Polarity=NPN, Power Dissipation=1W, Radiation Hardening=No, REACH SVHC="No SVHC", RoHS=Compliant, Schedule B="8541290080, 8541290080|8541290080|8541290080|8541290080|8541290080", Transition Frequency=100MHz, Voltage Rating (DC)=25V, Weight=179mg, Width=3.86mm
Q8: library part CMP-04895-000442-1, "IC OPAMP GP 2 CIRCUIT 8SOIC", Case/Package=SOIC, Input Bias Current=15pA, Input Offset Voltage (Vos)=1mV, Max Operating Temperature=125°C, Min Operating Temperature=-40°C, Operating Supply Current=90uA, Output Current per Channel=40mA, Gain Bandwidth Product=1MHz, Mount="Surface Mount", Number of Circuits=2, Number of Pins=8, Packaging="Cut Tape", RoHS Compliant=Yes, Slew Rate=1.5V/µs
Q9: library part CMP-0242-00004-1, "Programmable Voltage Reference, 2.5 to 36V, 3-Pin TO-92", ComponentLink1Description="Manufacturer URL", ComponentLink1URL=http://www.st.com, ComponentLink2Description=Datasheet, ComponentLink2URL=http://www.st.com/internet/com/TECHNICAL_RESOURCES/TECHNICAL_LITERATURE/DATASHEET/CD00000986.pdf, DatasheetVersion=Oct-2011, PackageDescription="TO, Flat Index; 3 In-Line, Axial Leads; Body Dia. 4.7mm; Lead Dia. 0.56 mm (max)", PackageReference=TO-92, PackageVersion=2011
Q12: library part CMP-194065-000027-1, "RX TXRX MOD WIFI TRACE ANT SMD"
Q14 Q15: library part SMD-TRANSISTORS-NPN-25V-500MW(SOT-23), "Bipolar (BJT) Transistor NPN 25 V 500 mA 150MHz 300 mW Surface Mount SOT-23", Package=None, Availability="In Stock", Check_prices=https://www.snapeda.com/parts/S8050/Umwelt+Sensor+Teknik/view-part/?ref=eda, MF=UMW, MP=S8050, Price=None, Purchase-URL=https://pricing.snapeda.com/search/part/S8050/?ref=eda, SnapEDA_Link=https://www.snapeda.com/parts/S8050/Umwelt+Sensor+Teknik/view-part/?ref=snap
R1 R2 R3 R11 R12 R13: library part CMP-03212-000011-1, "RES 2.2K OHM 5% 1/2W AXIAL", Case/Package=Axial, Max Operating Temperature=155°C, Max Power Dissipation=500mW, Min Operating Temperature=-55°C, Number of Resistors=1, Package Quantity=3000, Resistance=2.2kR, Resistance Tolerance=5%, Resistor Type="Thin Film", Temperature Coefficient=0ppm/°C, Voltage Rating=350V, Diameter=3mm, ELV=Compliant, Length=9mm, Mount=Axial, Number of Terminations=2, Packaging="Cut Tape", Power Rating=500mW, Radiation Hardening=No, REACH SVHC="No SVHC", RoHS Compliant=Yes, Series="CFR50, Neohm", Technology="CARBON FILM", Termination=Axial, Tolerance=5%, Voltage Rating (DC)=350V
R4 R5 R6 R7 R8 R9 R10 R14 R15 R17 R18 R19 R20 R21 R25 R26 R27 R28 R29 R30 R31 R32: library part CMP-2001-04376-1, Manufacturer=Panasonic, Part Number=ERJ-6ENF1002V
R16 R22 R23 R24: library part MFR-25FBF52-1K, "1.07 kOhms Â±1% 0.25W, 1/4W Through Hole Resistor Axial - Metal Film", Package="RADIAL-2 YAGEO", Check_prices=https://www.snapeda.com/parts/MFR-25FBF52-1K/Yageo/view-part/?ref=eda, MF=Yageo, MP=MFR-25FBF52-1K, SnapEDA_Link=https://www.snapeda.com/parts/MFR-25FBF52-1K/Yageo/view-part/?ref=snap
SW1 SW2: library part CMP-17879-000016-1, "SWITCH TACTILE SPST-NO 0.05A 12V", Color=Black, Contact Current Rating=50mA, Contact Resistance=100mR, Max Operating Temperature=70°C, Max Voltage Rating (DC)=50V, Min Operating Temperature=-20°C, Operating Force=160gf, Package Quantity=750, Voltage Rating (DC)=12V, Actuator Length=1.4mm, Actuator Material=Nylon, Actuator Type=Standard, Contact Material=Bronze, Contact Plating=Silver, Current Rating=50mA, Electrical Life=100000Cycles, Housing Material=Nylon, Illumination Type=Non-Illuminated, Lead Free="Lead Free", Length=6mm, Mechanical Life=100000Cycles, Mount="Through Hole", Orientation=Straight, Packaging=Bulk, Reach SVHC Compliant=Yes, RoHS Compliant=Yes, Series=TL1105, Size=6mm, Switch Function=Off-Mom, Switch Travel=0.25mm, Termination="PC Pin", Throw Configuration=SPST, Width=6mm
T: "5A Current Sense Transformer 50Hz ~ 60Hz Through Hole", Package="Talema Group LLC", Availability=Unavailable, MF="Talema Group LLC", MP=AX-0500, Price=None, SnapEDA_Link=https://www.snapeda.com/parts/AX-0500/Talema%20Group%20LLC/view-part/3208690/?ref=snap
T3: library part CMP-2000-05119-1, "Micro USB B Type Receptacle, -55 to 85 degC, 5-Pin SMD, RoHS, Tape and Reel", Color=Black, Current Rating=1.8A, Flammability Rating=UL94V-0, Insulation Resistance=1000MOhms, Manufacturer=FCI, Operating Temperature Range=-55Cto+85C, Brand=FCI, Connector Type=MicroUSBTypeBreceptacle, Contact Material=CopperAlloy, Contact Plating=Gold, Datasheet URL=http://datasheet.octopart.com/10118193-0001LF-FCI-datasheet-55953155.pdf, Datasheet Version="Rev. C, 05/2015", Factory Pack Quantity=1200, Gender=Female, Manufacturer URL=http://www.fci.com/, Mounting Angle=Right, Number of Contacts=5Contact, Packaging=Reel, Product=MicroUSBTypeBConnectors, Product Category=USBConnectors, RoHS=Details, Standard=USB2.0, Termination Style=SMD/SMT
U13: "USB Interface Integrated Circuit", Package=None, Availability="Not in stock", Check_prices=https://www.snapeda.com/parts/Ch340G/WCH/view-part/?ref=eda, MF=WCH, MP=Ch340G, Price=None, SnapEDA_Link=https://www.snapeda.com/parts/Ch340G/WCH/view-part/?ref=snap
VR2: library part CMP-1747-00004-1, "Square Trimpot(R) Trimming Potentiometer, 10 KOhm, 300 V, -55 to 125 degC, 3-Pin THD, RoHS, Tube", Case Code (Imperial)=0612, Case Code (Metric)=1632, Case/Package=1206, Max Operating Temperature=125degC, Min Operating Temperature=-25degC, Package Quantity=5000, Power Rating="1 W", Resistance="50 mohm", Tolerance=1%, Voltage Rating="220 mV", ComponentLink1Description="Manufacturer URL", ComponentLink1URL=http://www.bourns.com/, ComponentLink2Description=Datasheet, ComponentLink2URL=http://www.bourns.com/docs/Product-Datasheets/3362.pdf, DatasheetVersion=May-16, Height="0.6 mm", Length="3.2 mm", Mount="Surface Mount", PackageDescription="3-Pin Through Hole Device, Body 6.6 x 6.99 mm, Pitch 2.54 mm", PackageReference=3326P, Packaging="Tape and Reel", Pins=2, REACH SVHC="No SVHC", RoHSCompliant=True, Width="1.6 mm"

## Free pads (board coordinates)
  round 1.8 hole 1.2: 2(53.9,93) 2(76.3,96.9)
  round 1.524 hole 0.762: 3(91,10)
  round 3 hole 2.8: 6(2.5,4.5) 6(2.5,99.5) 6(97.5,4.5) 6(97.5,99.5)

## Via types
v1: diameter 1.27, hole 0.711, Top Layer to Bottom Layer, 42 vias
v2: diameter 0.5, hole 0.2, Top Layer to Bottom Layer, 1 vias

## Nets (pads, with @x,y where several pads share a name; then routed paths per layer and width w, separated by ;. In a path a pad name is that pad's centre, name@x,y a point inside that pad or via, vN(x,y) a via of type N, cw(c..) or ccw(c..) an arc to the next point about the centre after c; other vN are vias at no path point)
+3.3: C3.1 C10.1 C11.1 C13.1 C14.1 H1.1 H7.1 H7.2 H7.3 Q3.2 Q11.2 Q11.4 Q12.2 R5.1 R8.1 R15.1 R17.1 R19.2 R27.2 R31.1 R32.1 RTC.5 U13.4 U13.16 | length 349.7
  Top Layer w0.254: R8.1@10.244,57 9.05,57 7.925,58.125 R5.1 4.925,58.125 4.3,57.5 4.3,55 4.7,54.6 18.365,54.6 21.615,51.35 Q12.2 24.113,51.35 25.933,49.53 25.933,39.675 24.435,38.176 24.435,33.122 28.448,33.122 29.635,31.935 29.635,30.988 ; R31.1 25.933,13.3 26.033,13.2 C14.1 28.296,13.2 28.396,13.1 C13.1 30.04,13.1 30.084,13.145 33.528,13.145 33.825,12.848 R32.1@33.825,12.37 ; C10.1 31.5,31.906 30.553,31.906 29.635,30.988 ; U13.16 33.445,25.629 29.635,29.439 ; R32.1 R32.1@33.825,12.37 ; 61,14.545 61,12.192 61.795,11.397 65.024,11.397 66.125,12.498 R19.2 ; R17.1 R17.1@67.175,55.3 ; RTC.5 RTC.5@91.7,45.269 ; 29.635,29.439 29.635,28.695 27.018,26.078 24.384,26.078 23.86,25.554 23.86,23.72 30.48,17.1 Q11.2 33.852,17.1 34.188,16.764 34.188,12.733 R32.1@33.825,12.37 ; 29.635,29.439 U13.4 29.635,30.988
  Top Layer w0.6: H7.1 H7.2 H7.3 ; 33.852,17.1 Q11.4 39.795,12.005 41.7,10.1 46.7,10.1 ; R27.2 47.575,14.075 46.7,13.2 46.7,10.1 ; C11.1 46.7,8.95 46.7,10.1 ; v1(60.4,9.24) Q3.2 60.467,12.662 60.467,14.012 61,14.545 C3.1 ; R17.1@67.175,55.3 68.8,55.3 74.8,61.3 79.4,61.3 81.325,63.225 81.665,63.225 H1.1 ; v1(67.4,7.7) 68.5,7.7 72.5,3.7 91.9,3.7 95.5,7.3 95.5,42 92.84,44.66 ; H1.1@82.19,63.7 94,63.7 95.7,62 95.7,59.2 94.025,57.525 ; RTC.5 92.84,44.66 ; R15.1 93.875,57.525 95.6,55.8 95.6,47.2 93.06,44.66 92.84,44.66
  Bottom Layer w0.6: H7.1 8.4,4.9 10.6,2.7 26.049,2.7 26.4,3.051 26.4,4.5 28.4,6.5 C11.1 52.048,9.398 58.565,9.398 59.768,9.398 59.798,9.368 60.272,9.368 v1(60.4,9.24) ; v1@60.479,9.319 62.098,7.7 v1(67.4,7.7)
GND: C1.2 C2.2 C3.2 C4.1 C5.1 C6.1 C7.1 C9.2 C10.2 C11.2 C12.2 C13.2 C14.2 D11.1 D12.1 D15.1 D16.1 GSM.6 H4.14 H5.14 H6.1 H7.4 H7.5 H7.6 LDR.2 M1.6 Q1.3 Q2.3 Q3.1 Q5.1 Q6.3 Q7.2 Q7.3 Q8.4 Q9.2 Q11.1 Q12.1 Q12.15 Q12.38 Q12.39 R22.2 R23.2 RTC.6 SW1.1 SW1.2 SW2.1 SW2.2 T3.5 T.3 U13.1 VR2.1 | length 609.5
  Top Layer w0.254: Q1.3@3.53,63.18 2.08,63.18 1.7,62.8 1.7,53 3,51.7 5.854,51.7 7.214,53.06 H6.1 ; Q1.3 3.497,63.223 3.497,64.097 4,64.6 9.263,64.6 9.993,63.87 Q2.3 11.771,63.87 22.454,53.188 22.454,52.62 Q12.1 23.876,52.62 28.6,47.896 28.6,46.3 28.6,44.9 30,44.9 Q12.39@31.4,44.9 ; H7.4 11.049,15.68 12.429,14.3 C4.1 16.713,14.3 17.053,14.64 H4.14 21.031,14.64 ; SW1.2 21.031,6.931 21.031,14.64 ; SW1.1 24.65,6.199 25.903,7.452 25.903,11.044 26.559,11.7 C9.2 C12.2 30.226,11.7 31.15,12.624 32.004,12.624 32.6,12.028 T3.5 32.6,6.059 33.02,5.639 36.461,5.639 SW2.2 ; Q12.15 25.785,36.678 28.6,39.493 28.6,43.5 30,43.5 31.4,43.5 Q12.39@31.4,44.9 ; C13.2 28.396,14.9 28.296,15 C14.2 25.832,15 23.738,17.094 21.336,17.094 21.031,16.789 21.031,14.64 ; Q12.39@30,46.3 Q12.39@31.4,46.3 ; v1(32.69,21.107) 32.69,19.39 Q11.1 34.239,20.624 34.239,28.287 33.445,29.081 U13.1 33.445,31.344 33.3,31.489 C10.2 ; H5.14 46.238,14.64 46.736,15.138 49.913,15.138 50.876,14.175 D15.1 ; SW2.1 53.275,4.05 58.979,9.754 58.979,14.867 58.8,15.046 58.8,17.016 59.436,17.652 62.42,17.652 62.8,17.272 C3.2@62.8,16.358 ; M1.6 50.7,26.465 52.857,24.308 52.857,19.065 51.918,18.125 D16.1 51.916,16.145 51.9,16.129 D15.1 ; C11.2 52.832,7.682 52.832,13.921 52.578,14.175 D15.1 ; Q7.3@53.23,57.29 53.23,64.91 50.99,64.91 47,68.9 47,69.8 46.8,70 45,70 44.8,69.8 44.8,55.671 41.749,52.62 Q12.38 37.72,52.62 Q12.39@31.4,46.3 ; R22.2@58.6,58.5 61.8,58.5 64.1,60.8 64.1,63.4 66.1,65.4 D12.1 69.638,65.4 70.138,65.9 C1.2 ; Q3.1 62.69,14.173 62.8,14.283 C3.2@62.8,16.358 ; VR2.1 71.86,27 71.806,27.054 71.806,32.258 72.495,32.947 Q8.4 72.495,35.509 72.1,35.904 C7.1 72.1,39.345 72.25,39.495 LDR.2 ; C6.1 81.305,20.5 82.075,19.73 Q9.2 ; D11.1 87.4,59.665 88.205,59.665 88.9,60.36 ; Q6.3 88.9,60.36 ; RTC.6 88.9,50 88.9,60.36 ; R23.2 94.2,12.7 94.2,7.6 91.2,4.6 75.7,4.6 75.15,5.15 GSM.6 76.344,7.894 76.344,19.033 74.58,20.797 67.152,20.797 66.2,19.845 C5.1 66.2,18.771 65.213,18.771 C3.2@62.8,16.358 ; Q12.39@31.4,44.9 Q12.39@31.4,46.3
  Top Layer w0.6: H7.4 H7.5 H7.6
  Bottom Layer w0.254: SW1.2 SW1.1 ; v1(32.69,21.107) 32.88,21.298 37.442,21.298 H5.14 ; SW2.2 SW2.1 49.2,4.05 C11.2 ; Q7.3@53.23,57.29 53.44,57.5 53.44,58.34 54.3,59.2 57.9,59.2 R22.2@58.35,58.75 ; Q7.2@53.23,64.91 49.9,68.24 49.9,95.5 51.55,97.15 58.3,97.15 T.3@59.137,96.313 ; R22.2 66.7,58.5 68.9,56.3 68.9,54.5 69.47,53.93 Q5.1 76.51,50.4 87.798,50.4 90.23,52.832 Q6.3 ; LDR.2 74.43,39.395 ; Q9.2 87.17,19.73 R23.2 94.1,15.8 94.1,34.627 92.964,35.763 78.062,35.763 74.43,39.395 ; RTC.6 92.888,46.012 92.888,41.148 92.608,40.869 84.404,40.869 82.931,39.395 74.43,39.395
NetBAT_1: BAT.1 M1.5 | length 12.8
  Top Layer w0.8: M1.5 58.1,29.5 59.5,28.1 59.5,22.175 BAT.1
NetBAT_2: BAT.2 M1.4 | length 7.8
  Top Layer w0.8: BAT.2 62.35,25.476 62.7,25.826 M1.4
NetC1_1: C1.1 R16.2 R22.1 T.1 | length 78.3
  Top Layer w0.254: R22.1 69.101,61.401 R16.2 69.8,63.425 70.475,64.1 C1.1
  Bottom Layer w0.254: R16.2 60.6,62.1 60.2,62.5 60.2,63 59.5,63.7 58.4,63.7 57.7,64.4 57.7,65.3 56.6,66.4 53.4,66.4 51,68.8 51,94.7 52.2,95.9 55.8,95.9 58.2,93.5 61.4,93.5 64.3,96.4 T.1@71.829,96.4
NetC5_2: C5.2 H4.1 Q12.3 Q15.3 R29.1 R31.2 | length 201.4
  Top Layer w0.254: v1(17.043,24.536) 16.51,25.07 16.51,45.47 H4.1 ; Q12.3 21.12,50.08 H4.1 ; R31.2 R29.1 22.925,4.064 ; Q15.3 38.1,24.74 v1(39.319,24.74) ; C5.2 68,17.272 68.834,16.438 68.834,12.378 63.847,7.391 59.066,7.391 54.52,2.845 23.647,2.845 22.925,3.567 22.925,4.064 ; H4.1 14.646,51.714 7.62,51.714 4.6,48.694 4.6,6.1 8.185,2.515 21.376,2.515 22.925,4.064
  Bottom Layer w0.254: v1(17.043,24.536) 18.059,23.52 30.671,23.52 30.798,23.647 38.227,23.647 v1(39.319,24.74)
NetC7_2: C7.2 LDR.1 Q8.3 R20.2 | length 14.9
  Top Layer w0.254: LDR.1 73.9,40.725 C7.2 73.9,35.797 Q8.3 73.765,32.512 75.086,31.191 78.144,31.191 78.461,30.875 R20.2
NetC8_1: C8.1 D5.2 H1.2 Q4.A1 R9.2 | length 54.8
  Top Layer w0.254: D5.2 80.8,52.5 79.25,52.5 R9.2 79.25,53 81.5,53 84.4,55.9 C8.1@84.4,56.654
  Top Layer w0.7: Q4.A1 56.8,68.1 57.8,67.1 78.7,67.1 79.6,66.2 H1.2
  Bottom Layer w0.7: H1.2 79.6,56.4 81.5,54.5 D5.2
NetC8_2: C8.2 D5.1 D6.1 Q4.A2 Q5.3 | length 38.3
  Top Layer w0.254: Q5.3 73.801,57.291 D6.1 ; D6.1@76.325,57.6 76.325,58.42 76.833,58.928 80.899,58.928 81.327,58.5 C8.2 84.4,59.6 84.1,59.9 82.4,59.9 D5.1
  Bottom Layer w0.7: Q4.A2 68.8,67.9 69.6,67.1 72.4,67.1 72.98,66.52 Q5.3
NetC9_1: C9.1 C12.1 D14.1 Q11.3 | length 45.1
  Top Layer w0.254: v1(20.447,17.86) 22.196,19.609 ; D14.1 22.196,19.609 ; C9.1 27.94,9.9 ; v1(28.321,8.966) 28.321,9.519 27.94,9.9 ; C12.1 27.94,9.9 ; Q11.3 31.013,14.81 28.018,17.805 23.133,17.805 22.196,18.743 22.196,19.609
  Bottom Layer w0.254: v1(20.447,17.86) 20.447,16.967 19.304,15.824 18.11,15.824 17.526,15.24 17.526,11.176 18.974,9.728 27.559,9.728 v1(28.321,8.966)
NetD1_1: D1.1 D2.1 Q1.1 | length 9.2
  Bottom Layer w1: Q1.1@6.24,70.7 8.6,70.7 9.925,72.025 9.925,73.185 D2.1
  Bottom Layer w2: D2.1 D1.1
NetD1_2: D1.2 D3.1 R3.2 | length 32.1
  Top Layer w1.5: D1.2 13.6,79.7 16.2,77.1 22.4,77.1 25.4,74.1 R3.2
  Bottom Layer w2: D3.1 6.9,80.5 8.4,79 12.1,79 13.6,80.5 D1.2
NetD2_2: D2.2 D4.1 D7.2 D9.1 MOV1.2 MOV2.1 P1.2 P2.1 PS1.1 | length 148.3
  Top Layer w2: P1.2 8.8,97.24 8.8,88.65 10.2,87.25 D2.2 ; PS1.1 42.4,99.2 43.6,100.4 88.6,100.4 90.54,98.46 P2.1 90.54,92.742 90.75,92.532 MOV2.1 90.75,81.79 D9.1
  Bottom Layer w2: D4.1 3.6,84.628 4.772,85.8 9.028,85.8 10.2,84.628 D2.2 ; P1.2 9.46,94.64 10.984,93.116 39.616,93.116 42.4,95.9 PS1.1 ; D9.1 89.8,79.172 90.972,78 95.1,78 96.4,79.3 D7.2
NetD3_2: D3.2 D4.2 Q1.2 | length 6.2
  Top Layer w0.254: Q1.2 Q1.2@3.6,70.88
  Top Layer w1: Q1.2 3.597,70.877 3.597,71.746 3.6,71.749 D4.2 ; Q1.2@3.633,70.867 Q1.2@3.7,70.8
  Bottom Layer w2: D4.2 D3.2
NetD6_2: D6.2 R9.1 | length 3.2
  Top Layer w0.254: R9.1@78.675,54.44 D6.2@78.675,57.6
NetD7_1: D7.1 D8.1 Q6.1 | length 6.2
  Top Layer w0.7: Q6.1 92.77,70.51 93.1,70.84 D8.1
  Bottom Layer w2: D8.1 D7.1
NetD8_2: D8.2 D10.1 R11.2 | length 15.3
  Bottom Layer w2: R11.2 85.328,82.59 85.845,82.073 86.5,81.418 D10.1 ; 86.5,82.728 87.972,84.2 91.928,84.2 93.1,83.028 D8.2
NetD9_2: D9.2 D10.2 Q6.2 | length 6.1
  Top Layer w0.7: D9.2 89.8,70.839 90.23,70.409 Q6.2
  Bottom Layer w2: D10.2 D9.2
NetD11_2: D11.2 R19.1 | length 56
  Top Layer w0.254: v1(67.818,14.414) 67.818,14.843 R19.1 ; v1(78.308,27.305) 82.702,27.305 87.4,32.003 D11.2
  Bottom Layer w0.254: v1(67.818,14.414) 72.427,14.414 78.308,20.295 v1(78.308,27.305)
NetD12_2: D12.2 Q7.1 R16.1 | length 7.4
  Top Layer w0.254: Q7.1@55.77,64.91 58.532,64.91 D12.2@59.022,65.4 ; R16.1@58.85,62.05 59.4,62.6 D12.2
  Bottom Layer w0.254: D12.2@59.022,65.4 D12.2
NetD13_1: D13.1 H4.11 Q8.1 Q12.13 | length 107.2
  Top Layer w0.254: H4.11 20.374,23.934 20.374,27.432 21.736,28.794 21.736,34.648 21.39,34.994 21.39,36.906 21.864,37.38 Q12.13 ; v1(50.648,32.741) 59.639,32.741 71.425,44.526 76.81,44.526 77.648,43.688 77.648,38.43 76.305,37.087 76.305,36.576 ; Q8.1 76.305,36.576 ; D13.1 81.5,37.194 80.264,38.43 78.159,38.43 76.305,36.576
  Bottom Layer w0.254: H4.11 30.963,22.26 31.842,23.139 39.776,23.139 42.799,26.162 48.92,26.162 49.047,26.289 49.047,31.14 v1(50.648,32.741)
NetD13_2: D13.2 R21.2 | length 2.4
  Top Layer w0.254: R21.2 81.4,31.979 81.5,32.079 D13.2
NetD14_2: D14.2 T3.1 | length 16.5
  Top Layer w0.254: T3.1 30,8.385 30.556,8.941 30.556,10.592 v1(31.572,11.608)
  Bottom Layer w0.254: D14.2 27.25,15.93 v1(31.572,11.608)
NetD15_2: D15.2 R27.1 | length 3.2
  Top Layer w0.254: R27.1 50.14,12.325 50.64,11.825 D15.2
NetD16_2: D16.2 R28.1 | length 2.9
  Top Layer w0.254: R28.1 50.394,20.275 50.594,20.475 D16.2
NetGSM_1: GSM.1 pad.3 | length 5.8
  Top Layer w1.5: GSM.1 87.85,8.85 89,10 pad.3
NetGSM_3: GSM.3 H4.9 Q12.11 | length 104.5
  Top Layer w0.254: H4.9 20.65,29.29 20.371,34.061 20.371,39.182 21.109,39.92 Q12.11
  Bottom Layer w0.254: H4.9 17.272,27.34 14.681,24.749 14.681,20.828 17.043,18.466 19.366,18.466 21,20.1 30.751,20.1 37.453,13.398 68.602,13.398 72.5,9.5 72.5,5.5 73.3,4.7 82.251,4.7 82.77,5.219 GSM.3
NetGSM_4: GSM.4 H5.9 Q12.28 | length 79.5
  Top Layer w0.254: Q12.28 42.266,39.92 43.501,38.684 v1(46.787,38.684)
  Bottom Layer w0.254: H5.9 46.787,30.027 ; v1(46.787,38.684) 46.787,30.027 ; GSM.4 80.4,6.87 80.4,28.6 75.233,33.767 49.276,33.767 48.412,32.904 48.412,31.652 46.787,30.027
NetGSM_5: GSM.5 H5.10 Q12.27 | length 76
  Top Layer w0.254: Q12.27 41.309,38.65 42.875,37.084 42.875,26.025 H5.10
  Bottom Layer w0.254: H5.10 65.389,24.8 69.589,29 79,29 79.6,28.4 79.6,10.6 77.8,8.8 77.8,6.81 GSM.5
NetH4_2: H4.2 Q12.4 | length 5.9
  Top Layer w0.254: H4.2 20.273,46.693 20.273,47.171 21.911,48.81 Q12.4
NetH4_3: H4.3 Q12.5 | length 10
  Top Layer w0.254: Q12.5 23.622,47.54 24.384,46.778 v1(24.384,45.72)
  Bottom Layer w0.254: H4.3 21.244,42.58 v1(24.384,45.72)
NetH4_4: H4.4 Q12.6 R14.2 | length 95.5
  Top Layer w0.254: v1(21.285,46.33) 21.345,46.27 Q12.6 ; R14.2 90.551,57.525 90.551,49.962 v1(90.805,49.708)
  Bottom Layer w0.254: H4.4 22.082,40.04 25.4,43.358 25.4,47.422 25.146,47.676 22.631,47.676 ; v1(21.285,46.33) 22.631,47.676 ; v1(90.805,49.708) 24.663,49.708 22.631,47.676
NetH4_5: H4.5 Q12.7 R18.1 | length 115.1
  Top Layer w0.254: v1(20.498,45) Q12.7 ; v1(59.556,55.351) 61.125,55.351 R18.1
  Bottom Layer w0.254: H4.5 18.024,38.176 14.859,38.176 8.89,44.145 7.772,44.145 7.214,44.704 7.214,46.228 ; v1(20.498,45) 19.338,43.84 14.757,43.84 11.963,46.634 7.62,46.634 7.214,46.228 ; v1(59.556,55.351) 59.362,55.545 58.954,55.545 58.9,55.6 50.9,55.6 49.8,56.7 49.8,64.7 48.4,66.1 9.5,66.1 8.708,65.308 8.708,62.712 8.7,62.704 8.7,61.8 7.219,60.319 7.219,53.783 7.214,46.946 7.214,46.228
NetH4_6: H4.6 Q12.8 R4.1 | length 60
  Top Layer w0.254: R4.1@3.1,57.925 3.1,53.6 3.665,53.035 4.935,53.035 v1(5,53.1) ; H4.6 19.866,33.794 19.866,31.75 19.358,31.242 17.78,31.242 17.018,32.004 17.018,42.672 18.11,43.764 19.694,43.73 Q12.8
  Bottom Layer w0.254: v1(5,53.1) 5,38.79 7.239,36.551 14.467,36.551 16.057,34.96 H4.6
NetH4_7: H4.7 Q12.9 R7.1 | length 60
  Top Layer w0.254: v1(5.6,56) 8.1,56 8.5,55.6 13.475,55.6 R7.1 ; R7.1@13.82,55.9 R7.1@14.27,55.45 ; H4.7 17.526,33.594 17.526,38.176 18.212,38.862 19.304,38.862 19.915,39.473 19.915,40.692 21.683,42.46 Q12.9
  Bottom Layer w0.254: v1(5.6,56) 3.2,53.6 3.2,37.542 6.655,34.087 8.788,34.087 10.455,32.42 H4.7
NetH4_8: H4.8 Q12.10 R10.2 | length 67
  Top Layer w0.254: Q12.10 23.876,41.19 24.409,40.657 v1(24.409,39.649) 23.927,39.167 v1(23.927,32.106) ; v1(67.313,43.942) R10.2@71.196,47.825
  Bottom Layer w0.254: H4.8 20.926,32.106 v1(23.927,32.106) ; v1(24.409,39.649) 28.702,43.942 v1(67.313,43.942)